# Altium PCB 5_8.PcbDoc
Units mm, origin at the board's own origin, x right, y up, seen from the top; angles counter-clockwise.
Board outline 25 x 64 mm, 2 copper layers (Top Layer, Bottom Layer); 31 components, 22 nets, 67 pads, 5 vias.
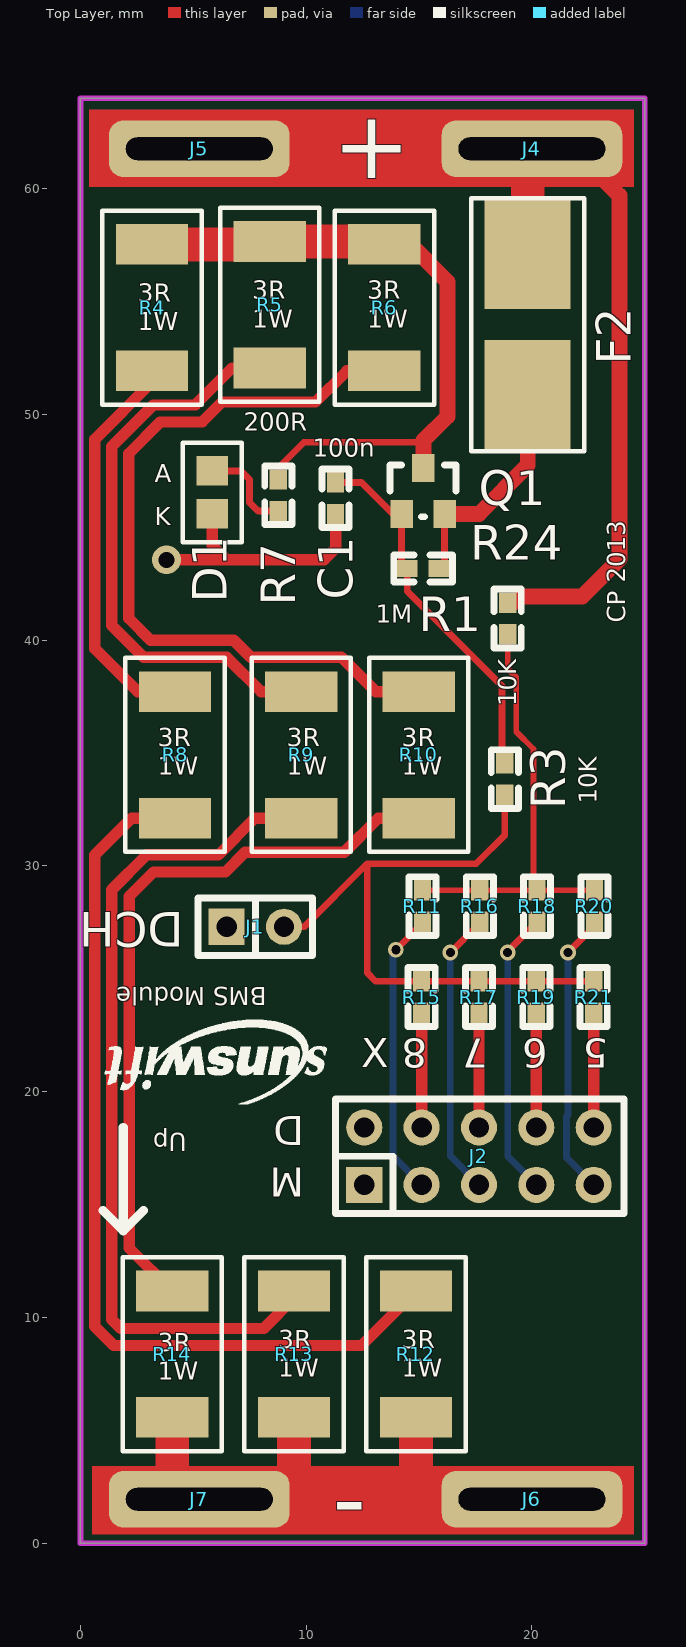
[diagram p0: Top Layer view]
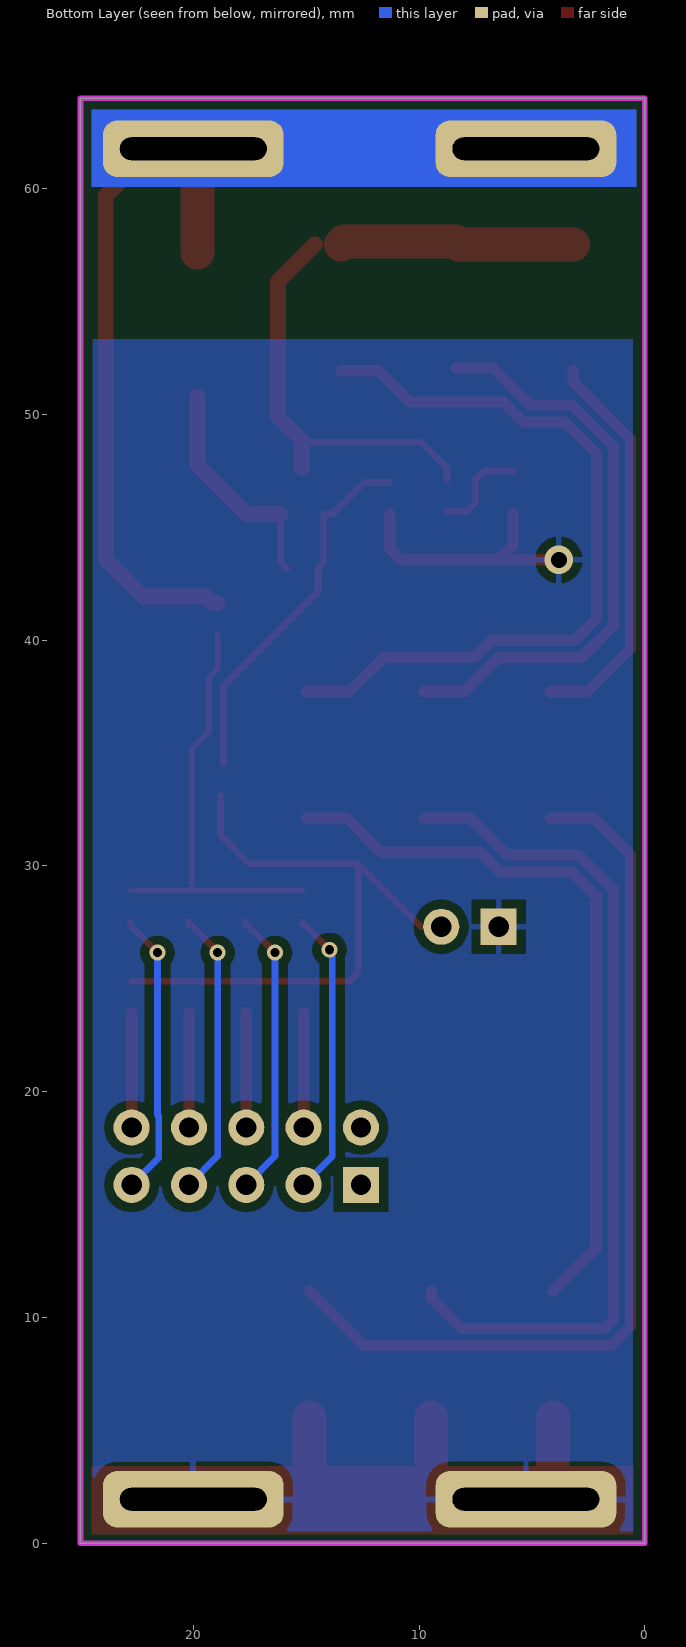
[diagram p1: Bottom Layer view, seen from below]

## Layer stack, top to bottom
Top Layer: signal copper 0.0356
Dielectric: core 0.32, FR-4, Dk 4.8
Bottom Layer: signal copper 0.0356

## Board outline
0,0 0,64 25,64 25,0

## Design rules (kind name [scope] priority, off if disabled: settings)
Clearance Clearance_1 [InNet('GND')] p1: gap=0.4
Clearance [All] p2: gap=0.254
PolygonConnect [All] p1: connectstyle=Relief reliefconductorwidth=0.254 reliefentries=4 polygonreliefangle="90 Angle"
RoutingVias [All] p1: holewidth=0.5 width=1.27 viastyle="Through Hole" minholewidth=0.4 minwidth=0.7 maxholewidth=1 maxwidth=1.27
SilkscreenOverComponentPads [All] p1 off: minsilkscreentomaskgap=0.254
SolderMaskExpansion [All] p1: expansion=0.102
Width [All] p1: maxlimit=3 minlimit=0.254 preferedwidth=0.254 minimp=50.000000 maximp=50.000000 favimp=50.000000
27 further rules are at their usual default settings.

## Components (designator, comment, footprint, x,y, rotation, side; value= is the part's Value field where it differs from the comment)
C1 "CAP" 0603 11.303,46.99 r270 top
D1 "LED" 0805LED 5.842,47.498 r270 top
F2 "FUSE" LITTELFUSE-154 19.812,53.975 r270 top
J1 "DCH" IDC2 6.477,27.305 r0 top
J2 "CON10" IDC10 12.573,15.875 r0 top
J4 "Tab" tab_connect 17.399,66.167 r180 top
J5 "Tab" tab_connect 2.667,66.167 r180 top
J6 "Tab" tab_connect 17.399,6.35 r180 top
J7 "Tab" tab_connect 2.667,6.35 r180 top
Q1 "MOSFET_P_Si2351DS" SOT23-3 14.224,45.593 r0 top
R1 "" 0603 14.478,43.18 r0 top
R3 "" 0603 18.796,33.147 r90 top
R4 "" 2512 3.175,57.531 r270 top
R5 "" 2512 8.382,57.658 r270 top
R6 "" 2512 13.462,57.531 r270 top
R7 "" 0603 8.763,47.117 r270 top
R8 "" 2512 4.191,37.719 r270 top
R9 "" 2512 9.779,37.719 r270 top
R10 "" 2512 14.986,37.719 r270 top
R11 "" 0603 15.148,27.524 r90 top
R12 "" 2512 14.859,11.176 r270 top
R13 "" 2512 9.461,11.176 r270 top
R14 "" 2512 4.064,11.176 r270 top
R15 "" 0603 15.113,23.495 r90 top
R16 "" 0603 17.688,27.524 r90 top
R17 "" 0603 17.653,23.495 r90 top
R18 "" 0603 20.228,27.524 r90 top
R19 "" 0603 20.193,23.495 r90 top
R20 "" 0603 22.768,27.524 r90 top
R21 "" 0603 22.733,23.495 r90 top
R24 "" 0603 18.923,40.259 r90 top

## Footprints (in the part's own frame and the unit in brackets; to place one, negate y for a bottom-side part, rotate by r counter-clockwise, add the part's x,y. Pads: shape width x height; smd on the part's side, far side on the other; paste and mask are expansions set on the pad)
0603 [mil]
  rect 35.43x30 smd: 1(0,0) 2(55,0)
  silkscreen extent -24,-24 79,24
0805LED [mm]
  rect 1.3x1.4 smd: A(0,0) K(1.9,0)
  silkscreen extent -1.25,-1.3 3.15,1.3
2512 [mm]
  rect 1.8x3.2 smd: 1(0,0) 2(5.6,0)
  silkscreen extent -1.5,-2.2 7.1,2.2
IDC2 [mm]
  rect 1.6x1.6 hole 0.9: 1(0,0)
  round 1.6 hole 0.9: 2(2.54,0)
  silkscreen extent -1.27,-1.27 3.81,1.27
IDC10 [mm]
  rect 1.6x1.6 hole 0.9: 1(0,0)
  round 1.6 hole 0.9: 2(0,2.54) 3(2.54,0) 4(2.54,2.54) 5(5.08,0) 6(5.08,2.54) 7(7.62,0) 8(7.62,2.54) 9(10.16,0) 10(10.16,2.54)
  silkscreen extent -1.27,-1.27 11.5,3.81
LITTELFUSE-154 [mm]
  rect 5x3.81 smd: 1(-3.185,0) 2(3.185,0)
  silkscreen extent -5.6,-2.51 5.6,2.5
SOT23-3 [mm]
  rect 1x1.25 smd: 1(0,0) 2(1.905,0) 3(0.965,2.032)
  silkscreen extent -0.51,-0.13 2.41,2.16
tab_connect [mm]
  rrect50% 8x2.5 hole 1 slot 6.5 at 0 deg: 0(-2.6,4.4)

## Part data
C1: "Capacitor"
F2: "Fuse"
J1: library part CON2
J2: "10 pin, right angle, ribbon con with claws"
J4 J5 J6 J7: library part tab_connection
Q1: "Si2351DS P-Channel MOSFET"
R1 R3 R4 R5 R6 R7 R8 R9 R10 R11 R12 R13 R14 R15 R16 R17 R18 R19 R20 R21 R24: library part RES1, "Resistor"

## Via types
v1: diameter 0.7, hole 0.4, Top Layer to Bottom Layer, 4 vias
v2: diameter 1.27, hole 0.711, Top Layer to Bottom Layer, 1 vias

## Nets (pads, with @x,y where several pads share a name; then routed paths per layer and width w, separated by ;. In a path a pad name is that pad's centre, name@x,y a point inside that pad or via, vN(x,y) a via of type N, cw(c..) or ccw(c..) an arc to the next point about the centre after c; other vN are vias at no path point)
DISCHARGE_LOCAL: J1.2 R3.1 R15.2 R17.2 R19.2 R21.2 | length 28.3
  Top Layer w0.3: J1.2 9.906,27.305 12.7,30.099 ; R3.1 18.796,31.369 17.526,30.099 12.7,30.099 ; R21.2 R19.2 R17.2 R15.2 13.081,24.892 12.7,25.273 12.7,30.099
DISCHARGE_REMOTE: R11.2 R16.2 R18.2 R20.2 R24.1 | length 19.4
  Top Layer w0.254: R11.2 R16.2 R18.2 R20.2 ; R24.1 18.923,38.735 19.304,38.354 19.304,35.941 20.066,35.179 R18.2@20.066,28.956
GND: C1.2 D1.K J1.1 J6.0 J7.0 R12.2 R13.2 R14.2 | length 25.6
  Top Layer w0.5: v2(3.81,43.561) 6.477,43.561 ; D1.K 5.842,44.196 6.477,43.561 ; C1.2 11.303,44.069 10.795,43.561 6.477,43.561 ; J6.0@19.05,2.899 J6.0 J6.0@20.828,2.779
  Top Layer w1.5: R14.2 4.064,3.153 J7.0 ; 9.398,1.905 9.461,1.968 R13.2 ; 14.732,1.905 14.859,2.032 R12.2
NetC1_1: C1.1 Q1.1 R1.1 R3.2 | length 16.4
  Top Layer w0.3: C1.1 12.446,46.99 13.843,45.593 Q1.1 14.224,43.434 R1.1 14.478,42.164 18.669,37.973 R3.2@18.669,34.544
NetD1_A: D1.A R7.2 | length 4.3
  Top Layer w0.3: D1.A 7.112,47.498 7.493,47.117 7.493,46.101 7.874,45.72 R7.2
NetJ2_3: J2.3 R11.1 | length 13
  Top Layer w0.3: v1(13.97,26.289) R11.1@15.148,27.467 ; J2.3 J2.3@15.367,15.875 ; R11.1@15.148,27.397 R11.1@15.148,27.467 ; R11.1 R11.1@15.148,27.467
  Bottom Layer w0.3: v1(13.97,26.289) 13.843,26.162 13.843,17.145 J2.3
NetJ2_4: J2.4 R15.1 | length 5.1
  Top Layer w0.5: J2.4 R15.1
NetJ2_5: J2.5 R16.1 | length 12.8
  Top Layer w0.3: v1(16.383,26.162) 17.618,27.397 17.688,27.397 R16.1
  Bottom Layer w0.3: v1(16.383,26.162) 16.383,17.145 J2.5
NetJ2_6: J2.6 R17.1 | length 5.1
  Top Layer w0.5: J2.6 R17.1
NetJ2_7: J2.7 R18.1 | length 13
  Top Layer w0.3: v1(18.923,26.162) 18.923,26.219 R18.1 R18.1@20.228,27.397
  Bottom Layer w0.3: v1(18.923,26.162) 18.923,17.145 J2.7 J2.7@20.32,15.875
NetJ2_8: J2.8 R19.1 | length 5.1
  Top Layer w0.5: J2.8 R19.1
NetJ2_9: J2.9 R20.1 | length 12.7
  Top Layer w0.3: v1(21.59,26.162) 22.768,27.34 R20.1
  Bottom Layer w0.3: v1(21.59,26.162) 21.59,18.975 21.529,18.914 21.529,17.079 J2.9
NetJ2_10: J2.10 R21.1 | length 5.1
  Top Layer w0.5: J2.10 R21.1
NetQ1_3: Q1.3 R4.1 R5.1 R6.1 R7.1 | length 28.9
  Top Layer w0.3: R7.1 8.763,47.625 9.906,48.768 15.113,48.768 15.189,48.844
  Top Layer w0.7: R6.1@14.605,57.531 16.256,55.88 16.256,49.911 15.189,48.844 Q1.3
  Top Layer w1.5: R4.1 8.255,57.531 R5.1 13.335,57.658 R6.1
NetR4_2: R4.2 R8.1 | length 17.7
  Top Layer w0.5: R4.2 3.175,51.435 0.635,48.895 0.635,39.624 2.54,37.719 R8.1
NetR5_2: R5.2 R9.1 | length 26
  Top Layer w0.5: R5.2 6.719,52.058 5.08,50.419 3.225,50.419 1.389,48.583 1.389,40.648 2.794,39.243 6.477,39.243 8.001,37.719 R9.1
NetR6_2: R6.2 R10.1 | length 34.3
  Top Layer w0.5: R6.2 11.799,51.931 10.414,50.546 6.273,50.546 5.392,49.665 3.538,49.665 2.143,48.27 2.143,40.96 3.106,39.997 6.789,39.997 7.543,39.243 11.557,39.243 13.081,37.719 R10.1
NetR8_2: R8.2 R12.1 | length 40.7
  Top Layer w0.5: R8.2 2.274,32.119 0.635,30.48 0.635,9.602 1.474,8.763 12.446,8.763 R12.1
NetR9_2: R9.2 R13.1 | length 37.8
  Top Layer w0.5: R13.1 9.461,10.858 8.12,9.517 1.786,9.517 1.389,9.914 1.389,28.948 2.932,30.491 6.107,30.491 7.735,32.119 R9.2
NetR10_2: R10.2 R14.1 | length 32.5
  Top Layer w0.5: R14.1 2.159,13.081 2.159,28.652 3.244,29.737 6.419,29.737 7.289,30.607 11.684,30.607 13.196,32.119 R10.2
VBAT: F2.1 J4.0 J5.0 R24.2 | length 31.3
  Top Layer w0.7: R24.2 19.177,41.656 19.457,41.936 22.225,41.936 23.876,43.587 23.876,59.69 21.799,61.767 J4.0
  Top Layer w1.5: F2.1 19.812,61.58 J4.0
VFUSE: F2.2 Q1.2 R1.2 | length 10.1
  Top Layer w0.3: R1.2 16.129,43.434 Q1.2
  Top Layer w0.7: Q1.2 17.653,45.593 19.812,47.752 F2.2
pads on no net: J2.1 J2.2

## Polygon pours and split planes (outlines as drawn)
GND on Bottom Layer "GND_PLANE" (solid, pour order 2): 24.511,0.381 0.508,0.381 0.508,53.34 24.511,53.34 24.511,0.381

## Keep-outs
Keep-Out Layer:
  the board outline again, w0.254

## Other copper
Top Layer:
  rectangle net VBAT: 0.381,60.071 24.511,63.5
  rectangle net GND: 0.508,0.381 24.511,3.429
Bottom Layer:
  rectangle net VBAT: 0.381,60.071 24.511,63.5

## Silkscreen, mask and mechanical layers (free items; w line width, h text height)
Top Overlay:
  drawing of 1662 lines, arcs and shapes, not listed
  text "+" at 11.176,60.452 h3
  text "3R" at 7.62,55.118 h0.81
  text "3R" at 12.7,55.118 h0.81
  text "3R" at 2.54,54.991 h0.81
  text "1W" at 7.62,53.848 h0.81
  text "1W" at 12.7,53.848 h0.81
  text "1W" at 2.54,53.721 h0.81
  text "200R" at 7.239,49.276 h0.8
  text "100n" at 10.287,48.133 h0.8
  text "A" at 3.302,46.99 h0.8
  text "K" at 3.302,45.085 h0.8
  text "1M" at 13.081,40.767 h0.8
  text "CP 2013" at 24.13,40.767 h0.8 r90
  text "10K" at 19.304,37.084 h0.8 r90
  text "3R" at 3.429,35.306 h0.81
  text "3R" at 9.144,35.306 h0.81
  text "3R" at 14.224,35.306 h0.81
  text "1W" at 3.429,34.036 h0.81
  text "1W" at 9.144,34.036 h0.81
  text "1W" at 14.224,34.036 h0.81
  text "10K" at 22.86,32.766 h0.8 r90
  text "BMS Module" at 8.255,24.638 h0.8 r180
  text "8" at 15.367,22.352 h1.3 r180
  text "7" at 18.034,22.352 h1.3 r180
  text "6" at 20.701,22.352 h1.3 r180
  text "5" at 23.368,22.352 h1.3 r180
  text "X" at 12.446,21.082 h1.3
  text "D" at 9.906,18.923 h1.3 r180
  text "Up" at 4.699,18.161 h0.8 r180
  text "M" at 9.906,16.637 h1.3 r180
  text "3R" at 8.763,8.636 h0.81
  text "3R" at 14.224,8.636 h0.81
  text "3R" at 3.429,8.509 h0.81
  text "1W" at 8.763,7.366 h0.81
  text "1W" at 14.224,7.366 h0.81
  text "1W" at 3.429,7.239 h0.81
  text "-" at 11.176,0.508 h3